# Altium PCB PCB1.PcbDoc
Units mil, origin at the board's own origin, x right, y up, seen from the top; angles counter-clockwise.
Board outline 3910 x 3910 mil, 2 copper layers (Top Layer, Bottom Layer); 110 components, 88 nets, 366 pads, 45 vias.
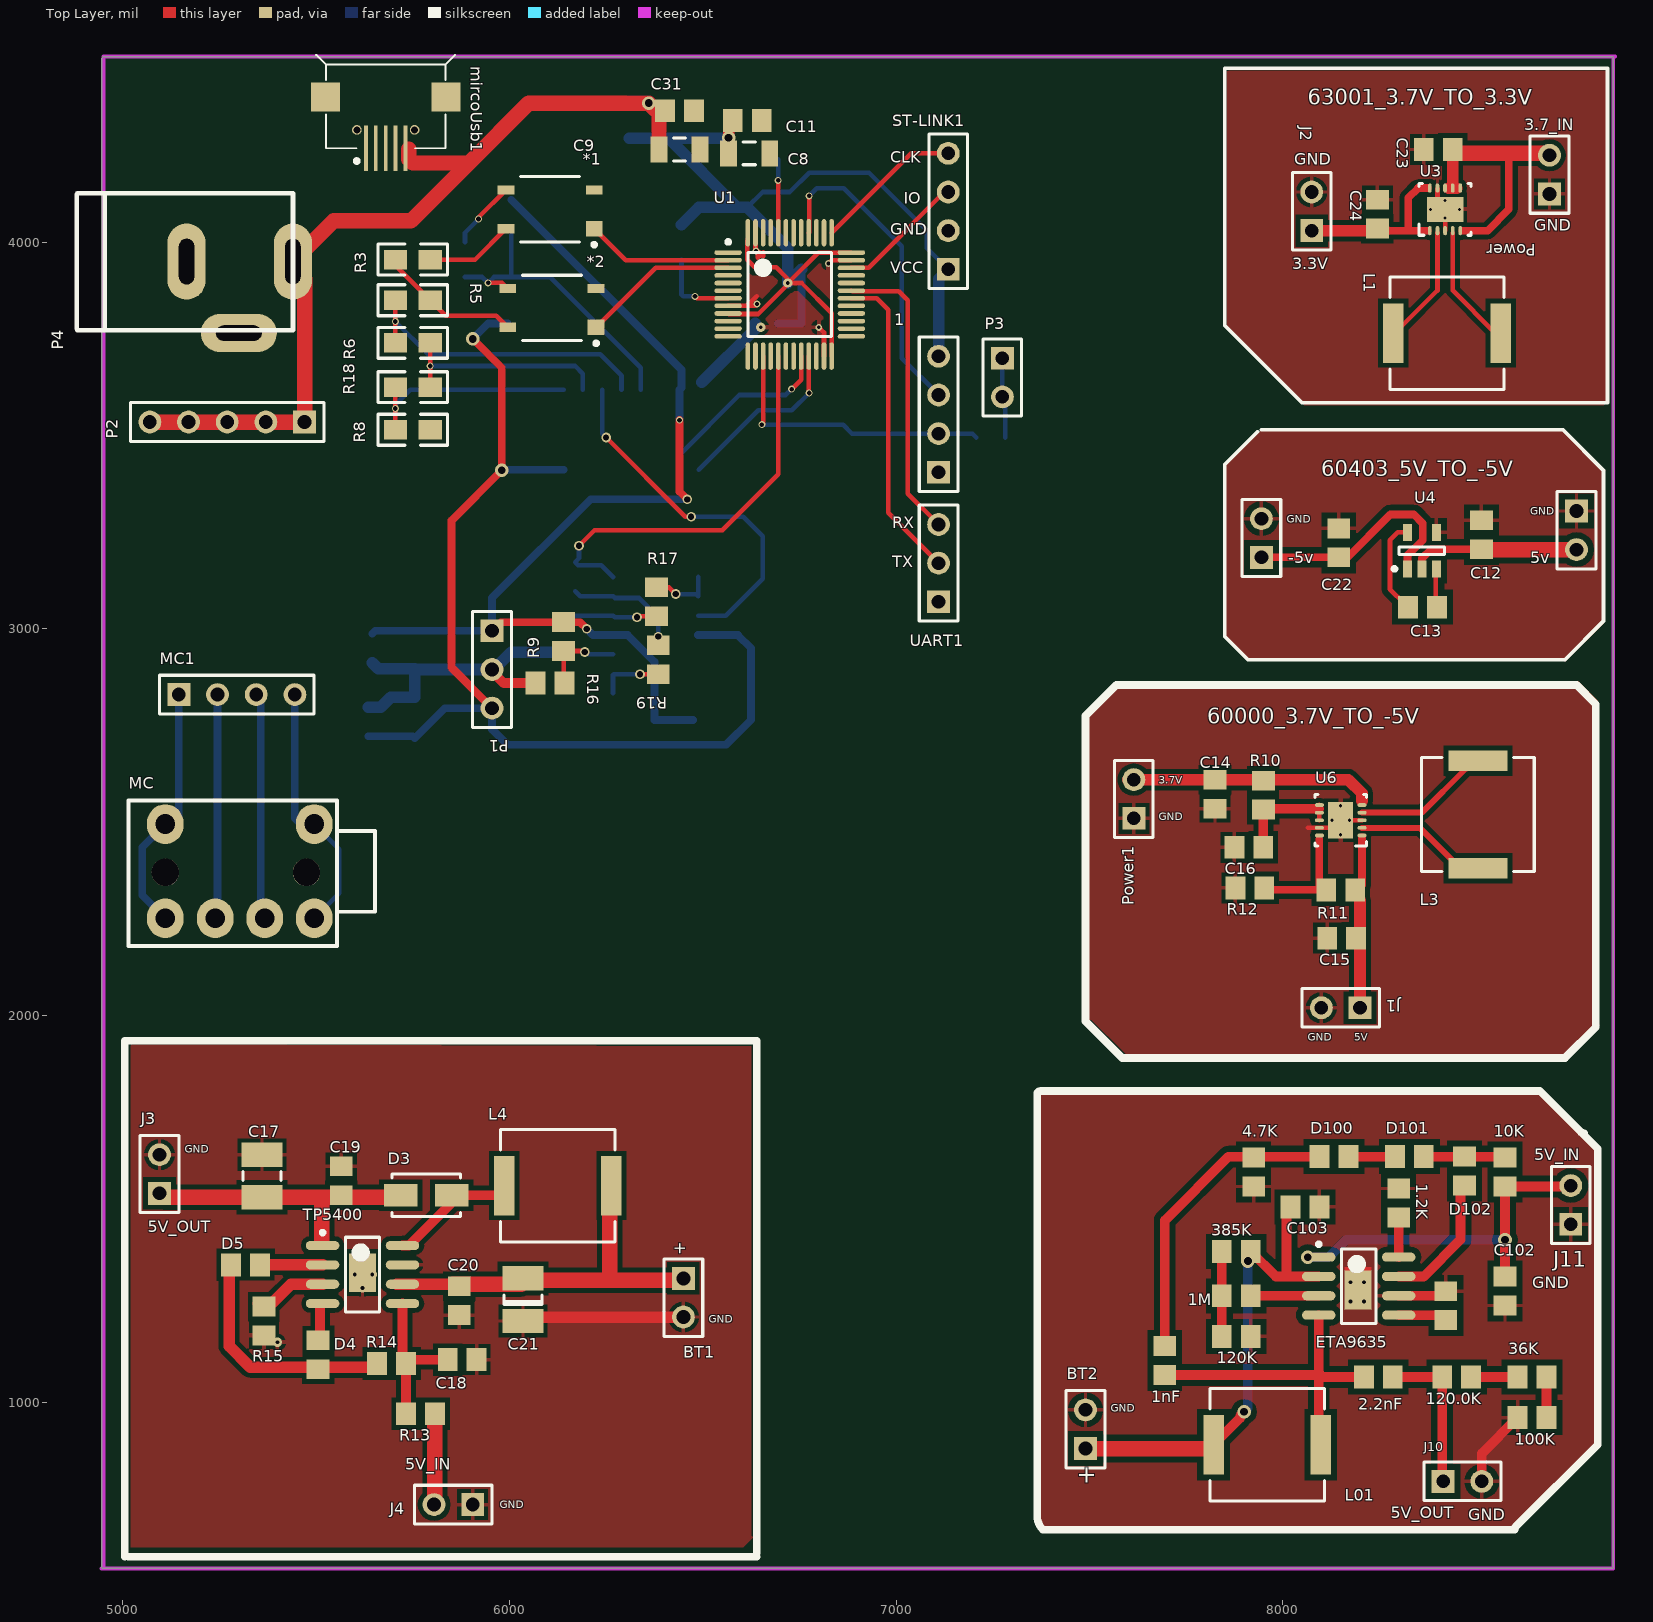
[diagram p0: Top Layer view]
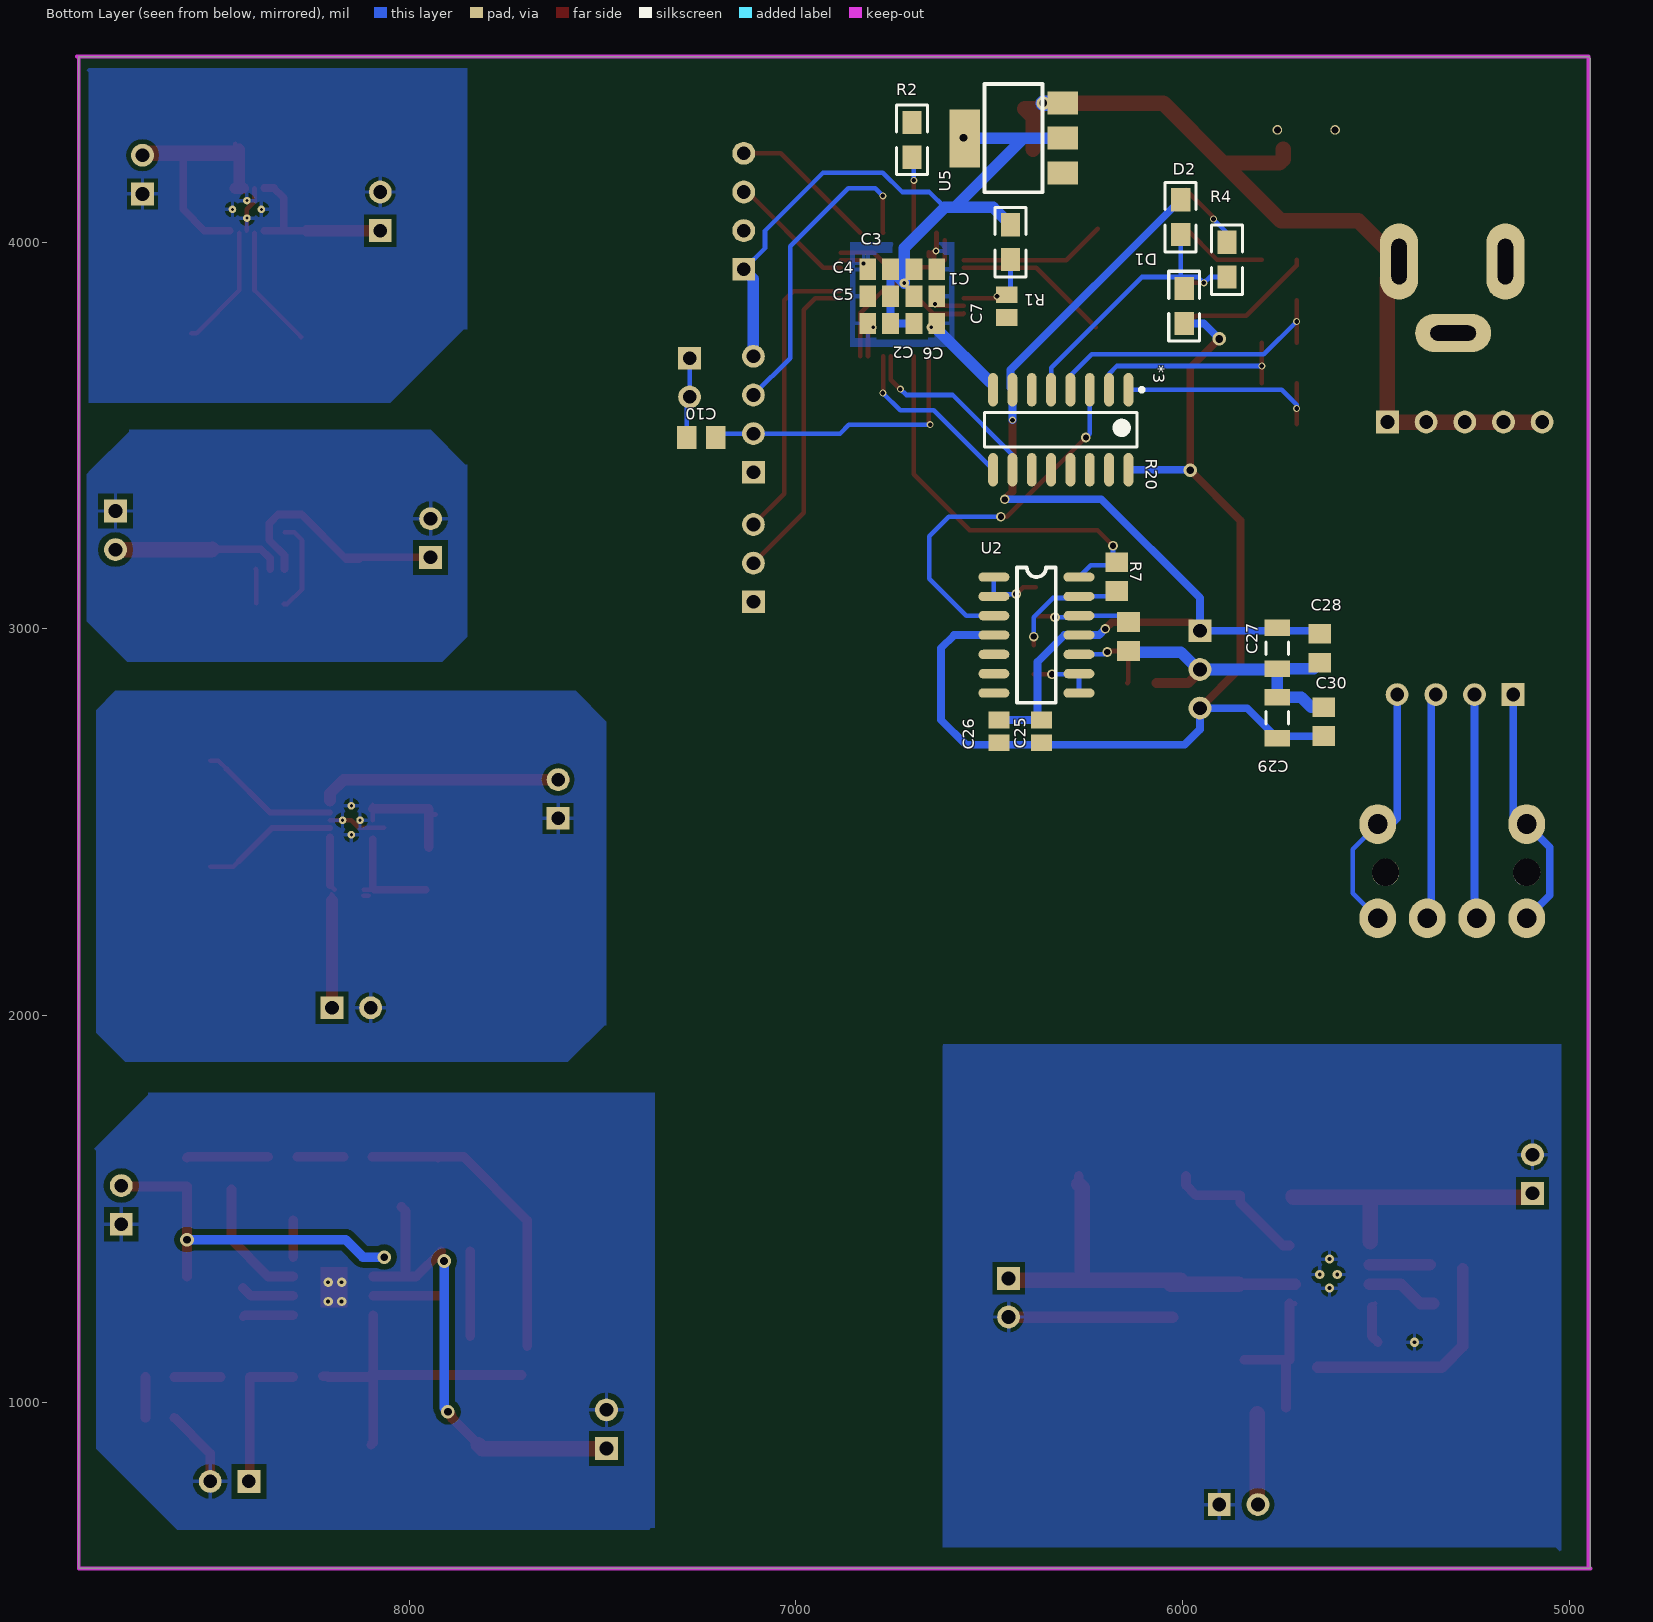
[diagram p1: Bottom Layer view, seen from below]

## Layer stack, top to bottom
Top Layer: signal copper 1.4
Dielectric: dielectric 12.6, FR-4, Dk 4.8
Bottom Layer: signal copper 1.4

## Board outline
4950,4480 8855,4480 8855,570 4945,570 4945,4475 4950,4480

## Design rules (kind name [scope] priority, off if disabled: settings)
Clearance [All] p1: gap=6
FabricationTestpoint [(IsPad And (OnTopLayer Or OnBottomLayer))] p1: side=3 testpointundercomponent=TRUE minsize=40 maxsize=100 preferedsize=60 minholesize=0 maxholesize=40 preferedholesize=32 testpointgrid=1 allowsidetop=TRUE allowsidebottom=TRUE usegrid=TRUE gridtolerance=0.01
HoleToHoleClearance [All] p1: gap=1 allowstackedmicrovias=TRUE
MinimumSolderMaskSliver [All] p1: minsoldermaskwidth=1
PolygonConnect [All] p1: connectstyle=Relief reliefconductorwidth=10 reliefentries=4 polygonreliefangle="90 Angle" airgapwidth=10
RoutingVias [All] p1: holewidth=14 width=28 viastyle="Through Hole" minholewidth=10 minwidth=10 maxholewidth=30 maxwidth=50
SilkToSilkClearance [All] p1: silktosilkclearance=1
SilkToSolderMaskClearance [IsPad] p1: minsilkscreentomaskgap=1 clearancetoexposedcopper=TRUE
SolderMaskExpansion [All] p1: expansion=4
Width [All] p1: maxlimit=50 minlimit=6 preferedwidth=12
23 further rules are at their usual default settings.

## Classes and differential pairs
component class NEW_POWER: 1.2K 1M 1nF 2.2nF 4.7K 10K 36K 100K 120.0K 120K 385K -2 BT1 BT2 C17 C18 C19 C20 C21 C102 C103 D3 D4 D5 D100 D101 D102 ETA1 ETA9635 J3 J4 J10 J11 L01 L4 R13 R14 R15 TP5400
component class SIGNAL: *1 *2 *3 C25 C26 C27 C28 C29 C30 D1 D2 MC MC1 P1 R3 R4 R5 R6 R7 R8 R9 R16 R17 R18 R19 R20 U2
component class mcu: 1 C1 C2 C3 C4 C5 C6 C7 C8 C9 C10 C11 mircoUsb1 P2 P3 P4 R1 R2 ST-LINK1 U1 U5 UART1
component class POWER: 5v -5v C12 C13 C14 C15 C16 C22 C23 C24 J1 J2 L1 L3 Power Power1 R10 R11 R12 U3 U4 U6

## Components (designator, comment, footprint, x,y, rotation, side; value= is the part's Value field where it differs from the comment)
1 "Header 4" HDR1X4 7110,3405 r90 top
1.2K "" 6-0805 8300,1515 r270 top
1M "" 6-0805 7880,1275 r180 top
1nF "" PCBComponent_1#1 7695,1070 r90 top
2.2nF "" PCBComponent_1#1 8210,1065 r0 top
4.7K "" 6-0805 7925,1595 r270 top
5v "Header 2" HDR1X2 8760,3305 r270 top
10K "" 6-0805 8575,1595 r90 top
36K "" 6-0805 8645,1065 r0 top
100K "" 6-0805 8645,960 r180 top
120.0K "" 6-0805 8450,1065 r0 top
120K "" 6-0805 7880,1170 r0 top
385K "" 6-0805 7880,1390 r180 top
*1 "AQY210_光耦" SOT254P605X218-4N 6105,4085 r180 top
*2 "AQY210_光耦" SOT254P605X218-4N 6110,3830 r180 top
*3 "74HC4052" SOP-16 6315,3515 r270 bottom
-5v "Header 2" HDR1X2 7945,3185 r90 top
BT1 "Battery" BAT-2 6450,1270 r270 top
BT2 "Battery" BAT-2 7490,930 r90 top
C1 "Cap" c0805 6665,3930 r0 bottom
C2 "Cap" c0805 6665,3860 r0 bottom
C3 "Cap" c0805 6785,3930 r180 bottom
C4 "Cap" c0805 6785,3860 r180 bottom
C5 "Cap" c0805 6785,3790 r180 bottom
C6 "Cap" c0805 6665,3790 r0 bottom
C7 "Cap" c0805 6455,3835 r90 bottom
C8 "Cap Pol2" C1206 6620,4230 r0 top
C9 "Cap Pol2" C1206 6440,4240 r0 top
C10 "Cap" 0805#1 7245,3495 r0 bottom
C11 "Cap" 0805#1 6615,4315 r180 top
C12 "" PCBComponent_1#1 8513.94,3206.02 r90 top
C13 "" PCBComponent_1#1 8323.94,3056.02 r0 top
C14 "" PCBComponent_1#1 7825,2535 r90 top
C15 "" PCBComponent_1#1 8115,2200 r0 top
C16 "" PCBComponent_1#1 7875,2435 r0 top
C17 "" 3225[1210] 5360,1585 r90 top
C18 "" PCBComponent_1#1 5915,1110 r180 top
C19 "" PCBComponent_1#1 5565,1610 r270 top
C20 "" PCBComponent_1#1 5870,1225 r90 top
C21 "" C1210 6035,1265 r90 top
C22 "" PCBComponent_1#1 8145,3185 r90 top
C23 "" PCBComponent_1#1 8365,4240 r0 top
C24 "" PCBComponent_1#1 8245,4110 r270 top
C25 "Cap" c0805 6365,2735 r90 bottom
C26 "Cap" c0805 6475,2735 r90 bottom
C27 "Cap Pol2" C1206 5755,2950 r270 bottom
C28 "Cap" 0805#1 5645,2950 r90 bottom
C29 "Cap Pol2" C1206 5755,2770 r270 bottom
C30 "Cap" 0805#1 5635,2760 r90 bottom
C31 "Cap" 0805#1 6440,4340 r180 top
C102 "" PCBComponent_1#1 8575,1250 r90 top
C103 "" PCBComponent_1#1 8095,1505 r180 top
D1 "Diode 1N4148" 0805#2 5995.83,3880 r270 bottom
D2 "Diode 1N4148" 0805#2 6005,4110 r270 bottom
D3 "SS24" CAPM4227X18N 5785,1535 r180 top
D4 "" PCBComponent_1#1 5505,1085 r90 top
D5 "" PCBComponent_1#1 5280,1355 r0 top
D100 "" PCBComponent_1#1 8170,1635 r180 top
D101 "" PCBComponent_1#1 8365,1635 r180 top
D102 "" PCBComponent_1#1 8470,1635 r270 top
ETA9635 "" SOP-8 8300,1225 r0 top
J1 "" HDR1X2 8200,2020 r180 top
J2 "" HDR1X2 8075,4030 r90 top
J3 "" HDR1X2 5095,1540 r90 top
J4 "" HDR1X2 5905,735 r180 top
J10 "" HDR1X2 8415,795 r0 top
J11 "" HDR1X2 8745,1460 r90 top
L1 "" INDP7474X40N 8425,3765 r180 top
L01 "" INDP7474X40N 7960,890 r0 top
L3 "" INDP7474X40N 8505,2520 r270 top
L4 "" INDP7474X40N 6125,1560 r180 top
MC "Header 4" PCBComponent_1#2 5380,2380 r270 top
MC1 "Header 4" HDR1X4 5145,2830 r0 top
mircoUsb1 "" Micro_USB 5680,4460 r90 top
P1 "Header 3" HDR1X3 5955,2995 r270 top
P2 "Header 5" HDR1X5 5470,3535 r180 top
P3 "Header 2" HDR1X2 7275,3700 r270 top
P4 "POWER" POWER_PLUG 5440,3950 r180 top
Power "Header 2" HDR1X2 8690,4125 r90 top
Power1 "Header 2" HDR1X2 7615,2510 r90 top
R1 "Res2" 0805#2 6445,4045 r270 bottom
R2 "Res2" 0805#2 6700,4310 r270 bottom
R3 "Res3" 0805#2 5705,3955 r0 top
R4 "Res3" 0805#2 5885,3910 r90 bottom
R5 "Res3" 0805#2 5705,3850 r0 top
R6 "Res3" 0805#2 5795,3740 r180 top
R7 "Res3" 0805#1 6140,2980 r90 bottom
R8 "Res3" 0805#2 5795,3515 r180 top
R9 "Res3" 0805#1 6140,2980 r90 top
R10 "" 2012[0805] 7950,2570 r90 top
R11 "" 2012[0805] 8150,2325 r0 top
R12 "" 2012[0805] 7915,2330 r0 top
R13 "0.3" 6-0805 5770,970 r180 top
R14 "1k" 6-0805 5695,1100 r180 top
R15 "1.2k" 6-0805 5365,1210 r270 top
R16 "Res3" 0805#1 6105,2860 r0 top
R17 "Res3" 0805#1 6380,3070 r90 top
R18 "Res3" 0805#2 5705,3625 r0 top
R19 "Res3" 0805#1 6385,2920 r270 top
R20 "Res3" 0805#1 6170,3135 r270 bottom
ST-LINK1 "Header 4" HDR1X4 7135,3930 r90 top
TP5400 "" SOP127P600X175-8N 5620,1330 r0 top
U1 "STM32L151C8T6" LQFP48_N 6725,3865 r0 top
U2 "OPA4277" SO-14 6630,3210 r180 bottom
U3 "TPS63001" QFN50P300X300X95-10M 8440,4325 r90 top
U4 "TPS60403" SOT95P280X110-5N 8360,3202.24 r90 top
U5 "LM1117-3.3" SOT223 6310,4178.9 r90 bottom
U6 "TPS63000" QFN50P300X300X95-10M 7910,2525 r180 top
UART1 "Header 3" HDR1X3 7110,3070 r90 top
? "" PCBComponent_1#1 8421.93,1286.93 r270 top

## Footprints (in the part's own frame and the unit in brackets; to place one, negate y for a bottom-side part, rotate by r counter-clockwise, add the part's x,y. Pads: shape width x height; smd on the part's side, far side on the other; paste and mask are expansions set on the pad)
6-0805 [mm] "Chip Resistor; Body 2.0 x 1.3 mm (LxW typ)"
  rect 1.3x1.5 smd: 1(-0.95,0) 2(0.95,0)
0805#1 [mm] "Chip Resistor; Body 2.0 x 1.3 mm (LxW typ)"
  rect 1.3x1.5 smd: 1(-0.95,0) 2(0.95,0)
0805#2 [mm]
  rect 1.524x1.27 smd: 1(0,0) 2(2.286,0)
  silkscreen extent -1.14,-1.02 3.43,1.02
2012[0805] [mm] "Chip Resistor; Body 2.0 x 1.3 mm (LxW typ)"
  rect 1.3x1.5 smd: 1(-0.95,0) 2(0.95,0)
3225[1210] [mm] "Chip Resistor; Body 3.2 x 2.5 mm (LxW typ)"
  rect 1.6x2.7 smd: 1(-1.4,0) 2(1.4,0)
  silkscreen extent -0.3,-1.25 0.3,1.25
BAT-2 [mm] "Multicell Battery; 2 Leads"
  rect 1.5x1.5 hole 0.9: 1(-1.27,0)
  round 1.5 hole 0.9: 2(1.27,0)
  silkscreen extent -2.54,-1.27 2.54,1.27
c0805 [mm] "Chip Capacitor, Body 2.0x1.3mm, IPC High Density"
  rect 1.1x1.4 smd: 1(-0.75,0) 2(0.75,0)
  body extent -1.1,-0.72 1.1,0.72, height 1.4
C1206 [mm] "Chip Capacitor, Body 3.2x1.6mm, IPC High Density"
  rect 1.1x1.7 smd: 1(-1.35,0) 2(1.35,0)
  silkscreen extent -0.4,-0.75 0.4,0.75, body extent -1.7,-0.9 1.7,0.9, height 1.3
C1210 [mm] "Chip Capacitor; Body 3.2 x 2.5 mm (LxW typ)"
  rect 1.6x2.7 smd: 1(-1.4,0) 2(1.4,0)
  silkscreen extent -0.3,-1.25 0.3,1.25
CAPM4227X18N [mm] "Molded Capacitor, 2-Leads, Body 4.2x2.7mm, IPC Medium Density"
  rect 2.2x1.45 smd: 1(-1.675,0) 2(1.675,0)
  silkscreen extent -2.25,-1.4 2.25,1.4, body extent -2.25,-1.4 2.25,1.4, height 1.8
HDR1X2 [mm] "Connector; Header; 2 Position"
  rect 1.5x1.5 hole 0.9: 1(0,0)
  round 1.5 hole 0.9: 2(2.54,0)
  silkscreen extent -1.27,-1.27 3.81,1.27
HDR1X3 [mm] "Connector; Header; 3 Position"
  rect 1.5x1.5 hole 0.9: 1(0,0)
  round 1.5 hole 0.9: 2(2.54,0) 3(5.08,0)
  silkscreen extent -1.27,-1.27 6.35,1.27
HDR1X4 [mm] "Connector; Header; 4 Position"
  rect 1.5x1.5 hole 0.9: 1(0,0)
  round 1.5 hole 0.9: 2(2.54,0) 3(5.08,0) 4(7.62,0)
  silkscreen extent -1.27,-1.27 8.89,1.27
HDR1X5 [mm] "Connector; Header; 5 Position"
  rect 1.5x1.5 hole 0.9: 1(0,0)
  round 1.5 hole 0.9: 2(2.54,0) 3(5.08,0) 4(7.62,0) 5(10.16,0)
  silkscreen extent -1.27,-1.27 11.43,1.27
INDP7474X40N [mm] "Precision Wire Wound Inductor, 2-Leads, Body 7.4x7.4mm, IPC Medium Density"
  rect 1.35x3.9 smd: 1(-3.525,0) 2(3.525,0)
  silkscreen extent -3.75,-3.7 3.75,3.7, body extent -3.7,-3.7 3.7,3.7, height 4
LQFP48_N [mm]
  oval 1.8x0.3 smd: 1(-4.05,2.75) 2(-4.05,2.25) 3(-4.05,1.75) 4(-4.05,1.25) 5(-4.05,0.75) 6(-4.05,0.25) 7(-4.05,-0.25) 8(-4.05,-0.75) 9(-4.05,-1.25) 10(-4.05,-1.75) 11(-4.05,-2.25) 12(-4.05,-2.75) 25(4.05,-2.75) 26(4.05,-2.25) 27(4.05,-1.75) 28(4.05,-1.25) 29(4.05,-0.75) 30(4.05,-0.25) 31(4.05,0.25) 32(4.05,0.75) 33(4.05,1.25) 34(4.05,1.75) 35(4.05,2.25) 36(4.05,2.75)
  oval 0.3x1.8 smd: 13(-2.75,-4.05) 14(-2.25,-4.05) 15(-1.75,-4.05) 16(-1.25,-4.05) 17(-0.75,-4.05) 18(-0.25,-4.05) 19(0.25,-4.05) 20(0.75,-4.05) 21(1.25,-4.05) 22(1.75,-4.05) 23(2.25,-4.05) 24(2.75,-4.05) 37(2.75,4.05) 38(2.25,4.05) 39(1.75,4.05) 40(1.25,4.05) 41(0.75,4.05) 42(0.25,4.05) 43(-0.25,4.05) 44(-0.75,4.05) 45(-1.25,4.05) 46(-1.75,4.05) 47(-2.25,4.05) 48(-2.75,4.05)
  silkscreen extent -4.17,-2.75 2.75,3.57
Micro_USB [mm]
  rect 3x0.25 smd: 1(-5.508,1.3) 2(-5.508,0.65) 3(-5.508,0) 4(-5.508,-0.65) 5(-5.508,-1.3)
  round 0.635 hole 0.457 unplated: MH1(-4.3,1.9) MH2(-4.3,-1.9)
  rect 1.9x1.9 smd: ""(-2.15,3.95) ""(-2.15,-3.95)
  silkscreen extent -6.47,-4.57 0.63,4.57
PCBComponent_1#1 [mm]
  rect 1.3x1.5 smd: 1(0,0) 2(1.9,0)
PCBComponent_1#2 [mm]
  oval 2.6x2.4 hole 1.3: 1(-2.921,2.921) 1(3.268,2.921) 2(3.268,-0.329) 3(3.268,-3.579) 4(-2.921,-6.858) 4(3.268,-6.858)
  round 1.8 hole 1.8: ""(0.254,2.413) ""(0.254,-6.858)
  silkscreen extent -4.47,-9.27 5.08,6.92
POWER_PLUG [mm]
  oval 2.5x5 hole 1 slot 3 at 90 deg: 1(0,0) 3(6.985,0)
  oval 5x2.5 hole 1 slot 3 at 0 deg: 2(3.556,4.699)
  silkscreen extent 0,-4.5 14.2,4.5
QFN50P300X300X95-10M [mm] "QFN, 10-Leads, Body 3.1x3.1mm (max), Pitch 0.50mm, IPC Low Density"
  oval 0.6x0.24 smd paste-0.102 mask+0.051: 1(-7.496,1.508) 2(-7.496,1.008) 3(-7.496,0.508) 4(-7.496,0.008) 5(-7.496,-0.492) 6(-4.696,-0.492) 7(-4.696,0.008) 8(-4.696,0.508) 9(-4.696,1.008) 10(-4.696,1.508)
  rect 1.65x2.4 smd paste-1.187 mask+0.051: 11(-6.096,0.508)
  round 0.5 / inner round 1.524 / far side round 0.5 hole 0.203 mask+0.051: V(-6.671,0.508) V_2(-6.096,1.458) V_3(-6.096,-0.442) V_4(-5.521,0.508)
  silkscreen extent -7.8,-1.19 -4.4,2.21
SO-14 [mil]
  oval 80x24 smd: 1(142,-76) 2(142,-126) 3(142,-176) 4(142,-226) 5(142,-276) 6(142,-326) 7(142,-376) 8(362,-376) 9(362,-326) 10(362,-276) 11(362,-226) 12(362,-176) 13(362,-126) 14(362,-76)
  silkscreen extent 202,-401 302,-51
SOP127P600X175-8N [mm] "SOP, 8-Leads, Body 4.9x3.9mm (max), Pitch 1.27mm, IPC Medium Density"
  oval 2.2x0.6 smd: 1(-2.625,1.905) 2(-2.625,0.635) 3(-2.625,-0.635) 4(-2.625,-1.905) 5(2.625,-1.905) 6(2.625,-0.635) 7(2.625,0.635) 8(2.625,1.905)
  silkscreen extent -2.75,-2.45 1.12,2.88, body extent -1.95,-2.45 1.95,2.45, height 1.75
SOP-8 [mm] "SOP, 8-Leads, Body 4.9x3.9mm (max), Pitch 1.27mm, IPC Medium Density"
  oval 2.2x0.6 smd: 1(-5.25,3.81) 2(-5.25,2.54) 3(-5.25,1.27) 4(-5.25,0) 5(0,0) 6(0,1.27) 7(0,2.54) 8(0,3.81)
  silkscreen extent -5.37,-0.55 -1.5,4.78, body extent -4.58,-0.55 -0.68,4.36, height 1.75
SOP-16 [mm] "SOP, 16-Leads, Body 10.0x8.9mm (max), Pitch 1.27mm, IPC Medium Density"
  oval 2.2x0.65 smd: 1(-2.625,4.445) 2(-2.625,3.175) 3(-2.625,1.905) 4(-2.625,0.635) 5(-2.625,-0.635) 6(-2.625,-1.905) 7(-2.625,-3.175) 8(-2.625,-4.445) 9(2.625,-4.445) 10(2.625,-3.175) 11(2.625,-1.905) 12(2.625,-0.635) 13(2.625,0.635) 14(2.625,1.905) 15(2.625,3.175) 16(2.625,4.445)
  silkscreen extent -2.75,-5 1.12,5.44, body extent -1.13,-5 1.12,5, height 1.75
SOT95P280X110-5N [mm] "SOT23, 5-Leads, Body 3.0x3.0mm (max), Pitch 0.95mm, IPC Medium Density"
  rect 1.1x0.6 smd: 1(-1.2,0.95) 2(-1.2,0) 3(-1.2,-0.95) 4(1.2,-0.95) 5(1.2,0.95)
  silkscreen extent -1.32,-1.5 0.25,1.92, body extent -0.85,-1.5 0.85,1.5, height 1.1
SOT223 [mil]
  rect 59x79 smd: 1(0,0) 2(90.55,0) 3(181.1,0)
  rect 150x79 smd: 4(89.88,253.54)
  silkscreen extent -49,52 231,202
SOT254P605X218-4N [mm] "SOT143, 4-Leads, Body 4.3x6.1mm (max), Pitch 2.54mm, IPC Medium Density"
  rect 1.1x1 smd: 1(-2.9,1.27)
  rect 1.1x0.6 smd: 2(-2.9,-1.27) 3(2.9,-1.27) 4(2.9,1.27)
  silkscreen extent -3.03,-2.15 1.95,2.44, body extent -1.94,-2.14 1.94,2.14, height 2.18

## Part data
1 MC MC1 ST-LINK1: "Header, 4-Pin"
1.2K 1M 4.7K 10K 36K 100K 120.0K 120K 385K: library part "Res Thermal", "Thermistor"
1nF 2.2nF C12 C13 C14 C15 C16 C18 C19 C20 C21 C22 C23 C24 C102 C103 ?: library part "Cap Semi", "Capacitor (Semiconductor SIM Model)"
5v -5v P3 Power Power1: "Header, 2-Pin"
*1 *2: "AQY210"
BT1 BT2: "Multicell Battery"
C1 C2 C3 C4 C5 C6 C7 C10 C11 C25 C26 C28 C30 C31: "Capacitor"
C8 C9 C27 C29: "Polarized Capacitor (Axial)"
C17: library part "Cap Pol3", "Polarized Capacitor (Surface Mount)"
D1 D2: library part "Diode 1N4002", "1 Amp General Purpose Rectifier"
D3: library part "Diode 11DQ03", "Schottky Rectifier"
D4 D5 D100 D101 D102: library part "Diode 1N4005", "1 Amp General Purpose Rectifier"
ETA9635 TP5400 U3 U4 U6: library part Component_1
J1 J2 J3 J4 J10 J11: library part "Header 2", "Header, 2-Pin"
L1 L01 L3 L4: library part Inductor, "Inductor"
mircoUsb1: library part "Header 5", "Header, 5-Pin"
P1 UART1: "Header, 3-Pin"
P2: "Header, 5-Pin"
R1 R2 R3 R4 R5 R6 R7 R8 R9 R16 R17 R18 R19 R20: "Resistor"
R10 R11 R12: library part "Res Semi", "Semiconductor Resistor"
R13 R14 R15: library part "Res Thermal"
U1: "STM32 ARM-based 32-bit MCU with 64 Kbytes Flash, 48-pin LQFP, Industrial Temperature"
U2: "High Precision Operational Amplifiers"

## Free pads (board coordinates)
  rect 70x100 smd: 0(5620,1335) 0(8195,1290)

## Via types
v1: diameter 18, hole 12, Top Layer to Bottom Layer, 12 vias
v2: diameter 24, hole 10, Top Layer to Bottom Layer, 11 vias
v3: diameter 25, hole 16, Top Layer to Bottom Layer, 10 vias
v4: diameter 35, hole 20, Top Layer to Bottom Layer, 8 vias
v5: diameter 18, hole 10, Top Layer to Bottom Layer, 4 vias

## Nets (pads, with @x,y where several pads share a name; then routed paths per layer and width w, separated by ;. In a path a pad name is that pad's centre, name@x,y a point inside that pad or via, vN(x,y) a via of type N, cw(c..) or ccw(c..) an arc to the next point about the centre after c; other vN are vias at no path point)
1.5_OR_16.6V: *2.3 *3.5 D1.1 D2.2 R4.1 | length 788.5
  Top Layer w12: v1(5945,3895) 5980.83,3895 *2.3
  Bottom Layer w12: R4.1 5930,3910 v1(5945,3895) 5960,3910 6005,3910 ; D2.2 6005,3910 ; *3.5 6340,3675 6105,3910 6005,3910
1.5V_4: *1.3 R4.2 | length 178.8
  Top Layer w12: v1(5920,4060) 5920,4064.17 *1.3
  Bottom Layer w12: R4.2 5885,4025 v1(5920,4060)
1.5V_4_SET: *1.1 U1.2 | length 380.1
  Top Layer w12: *1.1 6300.59,3953.58 U1.2
3.7V_1: C14.2 Power1.2 R10.2 U6.5 | length 639.5
  Top Layer w30: Power1.2@7600,2610 8170,2610 8205.12,2574.88 8205.12,2555
3.7V_2: C23.2 Power.2 U3.5 U3.6 U3.7 U3.8 | length 671.9
  Top Layer w12: C23.2@8450,4255 8450,4235 C23.2@8455,4230
  Top Layer w20: 8465,4029.88 8529.88,4029.88 8585,4085 8585,4230
  Top Layer w30: 8430,4140.12 U3.7 ; C23.2 8439.8,4140.24 U3.7 ; 8450,4140.12 U3.7
  Top Layer w40: C23.2@8455,4230 8585,4230 8685,4230 Power.2
5V: J4.2 R13.1 | length 236
  Top Layer w40: J4.2 5807.4,737.4 R13.1
5V_1: C15.2 J1.1 R11.2 U6.1 | length 441.7
  Top Layer w12: R11.2@8192.4,2325 R11.2@8205.12,2337.72 ; R11.2@8200,2297.4 8200,2312.6 R11.2@8201.02,2313.62
  Top Layer w20: R11.2@8205.12,2337.72 8205.12,2460.32
  Top Layer w30: J1.1@8195,2015 J1.1 R11.2@8200,2297.4
5V_3: 5v.2 C12.1 U4.2 | length 437.4
  Top Layer w20: U4.2 8360,3182.09 8383.94,3206.02 C12.1@8510,3206.02
  Top Layer w40: C12.1@8510,3206.02 8511.02,3205 5v.2
5V_4: *3.16 C25.1 C26.1 C29.2 C30.1 D1.2 P1.3 U2.4 | length 2810.8
  Top Layer w20: v4(5905,3750) 5980,3675 v4(5980,3410) 5850,3280 5850,2900 P1.3
  Bottom Layer w20: C30.1 5749.25,2722.6 C29.2 5833.15,2795 P1.3 5955,2740 5995,2700 6560,2700 6625,2765 6625,2950 6591,2984 U2.4 ; v4(5905,3750) 5945,3790 D1.2 ; v4(5980,3410) 5981.65,3411.65 *3.16
5V_IN: C9.1 C31.2 mircoUsb1.5 P2.1 P2.2 P2.3 P2.4 P2.5 P4.1 U5.3 | length 2318.8
  Top Layer w40: P2.5 P2.4 P2.3 P2.2 P2.1 5470,3905 5440,3935 P4.1 5545,4055 5745,4055 5895,4205 ; 5740,4240 5740,4215 5750,4205 5895,4205 ; C9.1 6386.85,4324.25 6407.6,4345 6375,4345 v4(6360,4360) 6050,4360 5895,4205
  Bottom Layer w40: U5.3 v4(6360,4360)
16.6V: *2.4 R3.1 R5.2 | length 372.1
  Top Layer w12: R3.1 5705,3940 R5.2 5835,3810 5965.83,3810 *2.4
16.6V_SET: *2.1 U1.3 | length 405.1
  Top Layer w12: *2.1 6378.07,3933.9 U1.3
187.5V_4: *3.4 R5.1 R6.2 | length 789.6
  Top Layer w12: R6.2 v1(5705,3795) R5.1
  Bottom Layer w12: v1(5705,3795) 5790,3710 6235,3710 6290,3655 *3.4
625V_4: *3.2 R6.1 R18.2 | length 549.9
  Top Layer w12: R18.2@5795,3635 v1(5795,3680) R6.1
  Bottom Layer w12: v1(5795,3680) 6170,3680 6190,3660 *3.2
1250V: *3.1 R8.2 R18.1 | length 565.9
  Top Layer w12: R8.2@5705,3530 5705,3580 R18.1@5705,3635
  Bottom Layer w12: v1(5705,3570) 5705,3580 5743.35,3618.35 *3.1
4052_A: *3.10 U1.20 | length 494.5
  Top Layer w12: v1(6730,3620) 6754.53,3644.53 U1.20
  Bottom Layer w12: *3.10 6440,3450 6595,3605 6715,3605 v1(6730,3620)
4052_B: *3.9 U1.21 | length 463
  Top Layer w12: U1.21 6774.21,3610.79 v1(6775,3610)
  Bottom Layer w12: *3.9 6643.35,3565 6730,3565 v1(6775,3610)
-2.5V_4: R9.1 R16.2 U2.10 | length 220
  Top Layer w12: R16.2 6140,2862.4 R9.1 6197.4,2942.6 v3(6195,2940.2)
  Bottom Layer w12: v3(6195,2940.2) 6201.2,2934 U2.10
-5V_1: -5v.1 C22.1 U4.1 | length 647.2
  Top Layer w20: -5v.1 C22.1@8167.94,3185 ; C22.1@8130,3180 8162.91,3180 8278.94,3296.02 8338.94,3296.02 8362.4,3272.56 8362.4,3229.49 8322.6,3189.69 U4.1
-5V_4: *3.7 C25.2 C26.2 C27.1 C28.2 D2.1 P1.1 R9.2 U2.11 | length 2698.5
  Top Layer w20: P1.1 5977.4,3017.4 R9.2 6182.6,3017.4 v3(6200,3000) ; v1(6440,3540) 6440,3355 v3(6460,3335)
  Bottom Layer w20: C28.2 5652.6,2995 P1.1 5955,3080 6210,3335 v3(6460,3335) ; D2.1 6445,3670 6445,3623.35 *3.7 v1(6440,3540) ; v3(6200,3000) 6216,2984 U2.11 6306,2984 6375,2915 6375,2764.53 C26.2
ADC_6: U1.16
ADC_7: R20.1 U1.17 U2.14 | length 1058.6
  Top Layer w12: v3(6180,3215) 6220,3255 6550.94,3255 6695.47,3399.53 U1.17
  Bottom Layer w12: v3(6180,3215) 6180,3182.4 R20.1 6177.4,3165 6237,3165 U2.14
ADC_8: U1.18
ADC_9: U1.19
ADC_20: U1.27
ADC_21: U1.28
COMP2_INM: U1.39
COMP2_INP: 1.3 U1.40 | length 830.6
  Top Layer w12: U1.40 6775,4025.24 v1(6775,4120)
  Bottom Layer w12: v1(6775,4120) 6795,4140 6865,4140 7015,3990 7015,3700 1.3
DAC_1: U1.14
DAC_2: 1.2 C10.1 U1.15 | length 747
  Top Layer w12: v1(6653.05,3528.05) 6656.1,3531.1 U1.15
  Bottom Layer w12: v1(6653.05,3528.05) 6863.05,3528.05 6886.1,3505 1.2 7197.6,3505 C10.1
GND: 1.1 *1.2 *2.2 *3.8 C1.1 C2.1 C3.1 C4.1 C5.1 C6.1 C7.1 C8.2 C9.2 C11.1 C27.2 C28.1 C29.1 C30.2 C31.1 mircoUsb1.1 P1.2 P4.2 P4.3 R2.1 R7.1 R8.1 R16.1 ST-LINK1.2 U1.8 U1.23 U1.35 U1.47 U5.1 UART1.1 | length 1426.4
  Top Layer w12: U1.8 6615.47,3835.47 ; U1.47 6636.42,3983.58 6651.22,3968.78 ; v5(6639.99,3840.47) 6634.99,3835.47 6615.47,3835.47 ; 6640,3860 6615.47,3835.47 ; v5@6642.68,3977.02 6642.68,3960.24 6656.68,3974.25 6656.68,3963.62 ; v5(6800,3780) 6813.58,3766.42 U1.23 ; v5(6825,3945) 6833.58,3953.58 U1.35
  Top Layer w25: P1.2@5955,2890 5985,2860 R16.1
  Bottom Layer w30: C30.2 5667.4,2797.4 5693.15,2823.15 C29.1 C27.2 ; C28.1 5660.75,2896.85 C27.2 ; P1.2@5955,2890 6005,2940 6137.4,2940 R7.1 ; P1.2 5756.85,2895 C27.2 ; *3.8@6497.5,3637.5 6635.47,3775.47 C6.1
  other v2: 6650,3780
  other v5: 6637.68,3977.33
GND_60403: 5v.1 -5v.2 C12.2 C22.2 U4.4
GND_63000: C14.1 C15.1 C16.1 J1.2 Power1.1 R12.1 U6.3 U6.9 U6.11 U6.V U6.V_2 U6.V_3 U6.V_4 | length 148
  Top Layer w12: 8065.31,2485.31 U6.9 8130.31,2485.31 U6.11 U6.V U6.3
GND_63001: C23.1 C24.1 J2.2 Power.1 U3.3 U3.9 U3.11 U3.V U3.V_2 U3.V_3 U3.V_4 | length 118.4
  Top Layer w12: U3.9 8400.31,4104.69 U3.11 U3.V U3.3
GND_ETA9635: 1.2K.1 4.7K.2 100K.2 120K.2 ?.1 BT2.2 C102.1 C103.1 ETA9635.6 J10.2 J11.1 pad.0@8195,1290 | length 341.6
  Top Layer w25: ETA9635.6 8410,1275 ?.1@8430,1295 ; J10.2 8515,867.4 100K.2
  other v2: 8175,1260 8210,1260 8175,1310 8210,1310
GND_TP5400: BT1.2 C17.2 C18.1 C19.1 C20.1 C21.1 J3.2 J4.1 pad.0@5620,1335 R15.2 TP5400.7 | length 430
  Top Layer w30: C21.1@6025,1220 BT1.2@6455,1220
  other v2: 5400,1155 5620,1295 5600,1330 5645,1330 5620,1370
IOUT: C17.1 C19.2 D3.2 J3.1 TP5400.1 | length 750.1
  Top Layer w12: C17.1@5385.12,1530 C17.1@5388.58,1526.54
  Top Layer w30: D3.2@5713.94,1529.88 D3.2
  Top Layer w40: J3.1 5105.12,1529.88 C17.1 5515,1529.88 ; TP5400.1@5515,1415 5515,1529.88 ; D3.2@5713.94,1529.88 5515,1529.88
Net1.2K_2: 1.2K.2 ETA9635.8 | length 95
  Top Layer w25: ETA9635.8 1.2K.2@8300,1470
Net1M_1: 1M.1 ETA9635.3 | length 175.9
  Top Layer w25: 1M.1 ETA9635.3
Net1M_2: 1M.2 120K.1 385K.2 | length 220
  Top Layer w25: 120K.1 1M.2 385K.2
Net1nF_1: 1nF.1 2.2nF.1 ETA9635.4 L01.2 | length 979.6
  Top Layer w25: 1nF.1@7710,1070 8088.31,1070 8093.31,1075 ; 8093.31,1196.69 8093.31,1075 ; ETA9635.4 8093.31,1075 ; L01.2 8093.31,895.47 8093.31,1075 ; 2.2nF.1@8223.31,1066.69 8210.7,1066.69 2.2nF.1 8103.31,1065 8093.31,1075
Net1nF_2: 1nF.2 4.7K.1 D100.2 | length 797.4
  Top Layer w25: 1nF.2 7695,1470 7860,1635 4.7K.1@7927.6,1635 ; 4.7K.1 4.7K.1@7927.6,1635 ; D100.2 4.7K.1@7927.6,1635
Net2.2nF_2: 2.2nF.2 120.0K.1 J10.1 | length 383.8
  Top Layer w25: 2.2nF.2@8299.8,1065 120.0K.1 8412.6,797.4 J10.1
Net10K_1: 10K.1 C102.2 ETA9635.1 J11.2 | length 932.4
  Top Layer w25: C102.2 v4(8575,1420) 10K.1 8742.6,1557.6 J11.2
  Bottom Layer w25: v4(8065,1375) 8120,1375 8165,1420 v4(8575,1420)
Net10K_2: 10K.2 D101.1 D102.1 | length 221.1
  Top Layer w25: D101.1@8375,1635 D101.1 D102.1 8572.4,1635 10K.2
Net36K_1: 36K.1 120.0K.2 | length 120.2
  Top Layer w25: 120.0K.2 36K.1
Net36K_2: 36K.2 100K.1 | length 105
  Top Layer w25: 100K.1 36K.2
Net385K_1: 385K.1 BT2.1 C103.2 ETA9635.2 L01.1 | length 1244.7
  Top Layer w25: L01.1 7890,958.78 7890,965 v4(7900,975) ; v4(7910,1365) 385K.1@7917.4,1372.4 ; 385K.1 7982.4,1325 8010,1325 ; C103.2 8010,1494.8 8010,1325 ; ETA9635.2 8010,1325
  Top Layer w40: BT2.1 7811.22,880 L01.1
  Bottom Layer w25: v4(7900,975) 7910,985 v4(7910,1365)
Net_2: ?.2 ETA9635.5 | length 132
  Top Layer w20: ?.2@8425.2,1225 ?.2@8430,1220.2
  Top Layer w25: ETA9635.5 ?.2@8425.2,1225
NetBT1_1: BT1.1 C20.2 C21.2 L4.1 TP5400.6 | length 1115.1
  Top Layer w25: L4.1@6268.78,1563.78 L4.1@6268.78,1585
  Top Layer w30: TP5400.6@5708.35,1305 C20.2@5855,1305
  Top Layer w40: C20.2@5855,1305 C21.2@6030,1305 ; C21.2@6005,1315.12 6260,1315.12 6260,1555 L4.1@6268.78,1563.78 ; 6185.12,1315.12 BT1.1@6450,1315.12
NetC10_2: C10.2 P3.1 P3.2 | length 208.1
  Bottom Layer w12: P3.1 P3.2 7282.4,3592.6 C10.2
NetC13_1: C13.1 U4.5 | length 242.7
  Top Layer w12: U4.5 8297.4,3249.49 8277.4,3229.49 8277.4,3102.56 8315.47,3064.49 C13.1@8323.94,3064.49
NetC13_2: C13.2 U4.3 | length 89.6
  Top Layer w12: C13.2@8395.87,3066.02 8395.87,3153.46 U4.3
NetC16_2: C16.2 R10.1 U6.6 U6.7 U6.8 | length 320.9
  Top Layer w12: R10.1@7932.4,2520 7950,2520 7952.4,2520 7950,2522.4 7949.8,2522.6 7949.8,2535 R10.1@7951.89,2537.09 ; U6.8 U6.7 8094.88,2535 U6.6
  Top Layer w25: R10.1@7949.8,2535 8094.88,2535 ; C16.2@7950,2435.2 7950,2520 7950,2522.4 R10.1
NetC18_2: C18.2 R13.2 R14.1 TP5400.5 | length 394
  Top Layer w12: TP5400.5@5710,1253.35 5708.35,1255 TP5400.5
  Top Layer w25: TP5400.5 5723.35,1110 C18.2 ; R13.2@5732.4,985.2 R14.1
NetD3_1: D3.1 L4.2 TP5400.8 | length 367.5
  Top Layer w25: TP5400.8 5740,1405 5850.94,1515.94 D3.1 5965,1535 5991.22,1561.22 L4.2@5991.22,1585
NetD4_1: D4.1 D5.1 R14.2 | length 597.8
  Top Layer w30: D5.1@5275,1345 5275,1145 5330,1090 R14.2@5650,1090
NetD4_2: D4.2 TP5400.4 | length 109.7
  Top Layer w12: TP5400.4@5501.65,1255 TP5400.4@5510,1246.65
  Top Layer w25: D4.2@5495,1155 5510,1170 TP5400.4@5510,1246.65
NetD5_2: D5.2 TP5400.2 | length 156.7
  Top Layer w30: D5.2@5360,1355 TP5400.2
NetD100_1: D100.1 D101.2 | length 120.2
  Top Layer w25: D100.1 D101.2
NetD102_2: D102.2 ETA9635.7 | length 329.4
  Top Layer w25: ETA9635.7 8365,1325 8460,1420 D102.2@8460,1550
NetL1_1: L1.1 U3.4 | length 318.4
  Top Layer w12: U3.4@8439.69,4023.98 8439.69,3875.31 8550,3765 L1.1
NetL1_2: L1.2 U3.2 | length 318.8
  Top Layer w12: L1.2@8280,3755 8400.32,3875.32 U3.2@8400.32,4023.98
NetL3_1: L3.1 U6.4 | length 365.4
  Top Layer w12: L3.1@8472.5,2637.5 8493.78,2658.78 L3.1 L3.1@8515,2658.78
  Top Layer w15: U6.4 8359.68,2524.68 L3.1@8472.5,2637.5
NetL3_2: L3.2 U6.2 | length 467.9
  Top Layer w12: 8360,2480 8442.37,2397.63 8455,2385 L3.2@8515,2385
  Top Layer w15: U6.2 8354.69,2485.31 L3.2@8442.37,2397.63
NetMC1_1: MC1.1 MC.4 | length 680.8
  Bottom Layer w20: MC.4@5100,2470 5115,2470 5145,2500 MC1.1 ; MC.4@5110,2251.34 5050,2311.34 5050,2435 MC.4@5110,2495
NetMC1_2: MC1.2 MC.3 | length 610.2
  Bottom Layer w20: MC.3@5229.1,2226.34 5245,2242.24 MC1.2
NetMC1_3: MC1.3 MC.2 | length 608.7
  Bottom Layer w20: MC1.3 5357.05,2817.95 MC.2@5357.05,2226.34
NetMC1_4: MC1.4 MC.1 | length 674.1
  Bottom Layer w12: MC.1@5495,2251.34 5560,2316.34 5560,2430 MC.1@5495,2495
  Bottom Layer w20: MC1.4 5445,2510 MC.1@5485,2470
NetR2_2: R2.2 U1.44 | length 190.7
  Top Layer w12: v1(6695,4160) 6695.47,4159.53 U1.44
  Bottom Layer w12: v1(6695,4160) R2.2@6695,4215
NetR7_2: R7.2 R17.1 U2.12 | length 249.6
  Top Layer w12: v3(6330,3030) 6332.6,3032.6 R17.1
  Bottom Layer w12: R7.2 6156.6,3034 U2.12 6272,3030 v3(6330,3030)
NetR11_1: R11.1 R12.2 U6.10 | length 306.2
  Top Layer w12: R11.1@8090,2325 R11.1@8117.6,2325 ; R11.1@8105,2310 R11.1@8118.98,2310
  Top Layer w20: R12.2@7957.4,2325 8090,2325 8094.88,2329.88 8094.88,2455
NetR15_1: R15.1 TP5400.3 | length 187.4
  Top Layer w30: R15.1@5350,1255 5385,1255 5435,1305 TP5400.3
NetR17_2: R17.2 U2.1 U2.2 | length 167.7
  Top Layer w12: R17.2 6412.6,3107.4 v3(6430,3090)
  Bottom Layer w12: v3(6430,3090) 6482,3090 U2.2 U2.1
NetR19_1: R19.1 R20.2 U2.13 | length 315.6
  Top Layer w12: R19.1 v3(6385,2980)
  Bottom Layer w12: R20.2 6183.6,3084 U2.13 6272,3080 6335,3080 6385,3030 v3(6385,2980)
NetR19_2: R19.2 U2.8 U2.9 | length 164.8
  Top Layer w12: v3(6337.6,2882.6) R19.2
  Bottom Layer w12: U2.8 6268,2881.2 6269.4,2882.6 v3(6337.6,2882.6)
NRST: C7.2 R1.2 U1.7 | length 214.9
  Top Layer w12: v1(6480,3860) 6484.84,3855.16 U1.7
  Bottom Layer w12: R1.2 6445,3864.53 6449.53,3860 v1(6480,3860)
PA1: U1.11
PA2: U1.12
PA3: U1.13
SIGNAL_IN: *1.4 R3.2 | length 229
  Top Layer w12: R3.2 5910.83,3955 *1.4
SWCLK: ST-LINK1.4 U1.37 | length 386.9
  Top Layer w12: U1.37 7038.82,4230 ST-LINK1.4
SWDIO: ST-LINK1.3 U1.34 | length 331.8
  Top Layer w12: U1.34 6928.9,3933.9 7125,4130 ST-LINK1.3
TO_ZOOM: *3.3 U2.3 | length 954.9
  Top Layer w12: v3(6250,3495) 6455,3290 v3(6470,3290)
  Bottom Layer w12: *3.3 6240,3505 v3(6250,3495) ; v3(6470,3290) 6605,3290 6655,3240 6655,3130 6559,3034 U2.3
URX: U1.31 UART1.3 | length 769
  Top Layer w12: U1.31 6886.23,3873.06 7006.94,3873.06 7030,3850 7030,3350 UART1.3
UTX: U1.30 UART1.2 | length 816.9
  Top Layer w12: U1.30@6884.45,3855.06 6949.94,3855.06 6980,3825 6980,3300 UART1.2
VCC33: C24.2 J2.1 U3.1 U3.10 | length 457.6
  Top Layer w12: C24.2@8255,4025.2 C24.2@8259.68,4029.88
  Top Layer w20: C24.2@8259.68,4029.88 8325,4029.88 ; 8375,4029.88 8325,4029.88 ; 8375.32,4140.12 8350.12,4140.12 8325,4115 8325,4029.88
  Top Layer w30: J2.1 C24.2@8264.8,4030
VCC33_MCU: 1.4 C1.2 C2.2 C3.2 C4.2 C5.2 C6.2 C8.1 C11.2 R1.1 ST-LINK1.1 U1.9 U1.24 U1.36 U1.48 U5.2 U5.4 | length 3027.6
  Top Layer w12: U1.9 6566.87,3814.47 6643.69,3814.47 6720,3890.78 v2(6720,3894.53) ; U1.48@6615,4005 6615,3955 6635,3935 6690,3935 6720,3905 v2(6720,3894.53) ; U1.24 6833.27,3816.73 6755.47,3894.53 v2(6720,3894.53) ; U1.36 6798.74,3973.27 v2(6720,3894.53)
  Top Layer w30: C8.1 6566.85,4304.25 C11.2
  Bottom Layer w12: 6615,4090 6655,4130 6725,4130 6775,4180 6930,4180 7080,4030 7080,3985 ST-LINK1.1
  Bottom Layer w20: C6.2 C5.2 C4.2 C3.2
  Bottom Layer w30: U5.2 6380,4269.45 6380.67,4268.78 6411.22,4268.78 ; R1.1 6490,4090 6590,4090 ; U5.4 6411.22,4268.78 ; C3.2 v2(6720,3894.53) 6720,3985 6615,4090 6590,4090 ; 1.4 7110,3905 ST-LINK1.1 ; 6411.22,4268.78 6590,4090
  other v4: 6566.85,4270
pads on no net: *3.6 *3.11 *3.12 *3.13 *3.14 *3.15 MC. mircoUsb1. mircoUsb1.2 mircoUsb1.3 mircoUsb1.4 mircoUsb1.MH1 mircoUsb1.MH2 U1.1 U1.4 U1.5 U1.6 U1.10 U1.22 U1.25 U1.26 U1.29 U1.32 U1.33 U1.38 U1.41 U1.42 U1.43 U1.45 U1.46 U2.5 U2.6 U2.7

## Polygon pours and split planes (outlines as drawn)
GND_ETA9635 on Top Layer "Top Layer-No Net" (solid, remove dead copper, pour order 19): 7380,665 7385,670 8595,670 8810,885 8820,895 8820,1650 8670,1800 8665,1805 7370,1805 7370,675 7380,675
GND_63000 on Top Layer "Top Layer-No Net" (solid, remove dead copper, pour order 22): 8764.61,2864.53 8759.61,2859.53 7579.61,2859.53 7574.61,2859.53 7494.61,2779.53 7494.61,1989.53 7504.61,1989.53 7589.61,1904.53 7599.61,1894.53 8724.61,1894.53 8739.61,1894.53 8819.61,1974.53 8814.61,1979.53 8814.61,2809.53 8814.61,2814.53 8764.61,2864.53
GND_60403 on Top Layer "Top Layer-No Net" (solid, remove dead copper, pour order 23): 7945,3515 8725,3515 8730,3515 8835,3410 8830,3405 8830,3020 8830,3015 8730,2915 8725,2920 7915,2920 7910,2920 7850,2980 7850,3425 7855,3425 7945,3515
GND_63001 on Top Layer "Top Layer-No Net" (solid, remove dead copper, pour order 24): 7855.35,4448.23 7860.35,4443.23 8845.35,4443.23 8845.35,3593.23 8835.35,3583.23 8830.35,3578.23 8055.35,3578.23 7855.35,3778.23 7855.35,4448.23
GND on Top Layer "Keep-Out Layer-No Net" (solid, pour order 20): 6589.97,3999.97 6589.97,3729.97 6859.97,3729.97 6859.97,3999.97
GND_TP5400 on Top Layer "Keep-Out Layer-No Net" (solid, pour order 33): 5020,1925 5020,625 6605,625 6630,650 6625,655 6625,1920
GND_ETA9635 on Bottom Layer "Top Layer-No Net" (solid, remove dead copper, pour order 25): 7380,670 8600,670 8810,880 8810,1650 8815,1655 8675,1795 8675,1800 7365,1800 7365,675 7375,675 7380,670
GND_63000 on Bottom Layer "Top Layer-No Net" (solid, remove dead copper, pour order 26): 8750,2840 7570,2840 7490,2760 7490,1975 7495,1975 7585,1885 7590,1880 8725,1880 8735,1880 8810,1955 8810,2790 8760,2840
GND_60403 on Bottom Layer "Top Layer-No Net" (solid, remove dead copper, pour order 27): 7945,3515 8725,3515 8725,3510 8825,3410 8835,3400 8835,3020 8735,2920 8730,2915 7915,2915 7850,2980 7850,3425 7855,3425 7945,3515
GND_63001 on Bottom Layer "Top Layer-No Net" (solid, remove dead copper, pour order 28): 7849.53,4449.53 8829.53,4449.53 8834.53,4444.53 8829.53,4439.53 8829.53,3584.53 8049.53,3584.53 7859.53,3774.53 7849.53,3774.53 7849.53,4449.53
GND on Bottom Layer "Keep-Out Layer-No Net" (solid, pour order 21): 6590,4000 6590,3730 6860,3730 6860,4000
GND_TP5400 on Bottom Layer "Keep-Out Layer-No Net" (solid, pour order 35): 5020,1925 5020,610 5035,625 6620,625 6620,1920 6625,1925

## Keep-outs
Keep-Out Layer:
  lines w10: 4945,570 8855,570 8855,4480 ; 4950,570 4950,4480 8860,4480

## Other copper
Top Layer:
  rectangle net GND_ETA9635: 8160,1245 8230,1350

## Silkscreen, mask and mechanical layers (free items; w line width, h text height)
Top Overlay:
  lines w10: 7850,3410 7850,3425 7935,3510 ; 7850,3420 7850,2980 7910,2920 8730,2920 8830,3020 8830,3410 8725,3515 7945,3515 ; 8047.5,3587.5 7850,3785 7850,4450 8840,4450 8840,3585 8050,3585
  lines w20: 5005,600 5005,1935 6640,1935 ; 5015,600 6640,600 ; 6640,610 6640,1932.93 ; 7515,1805 8665,1805 8815,1655 8815,890 8603.54,678.54 ccw(c8612.07,670) 8600,670 7380,670 cw(c7416.21,706.21) 7365,706.21 7365,1800 cw(c7377.07,1787.93) 7377.07,1805 7530,1805 ; 8771.46,1698.54 ccw(c8780,1707.07) 8780,1695 ; 7490,1985 7585,1890 8730,1890 8810,1970 8810,2805 8760,2855 7620,2855 7570,2855 7490,2775 7490,1985
  text "63001_3.7V_TO_3.3V" at 8065,4355 h40
  text "3.7_IN" at 8625,4290 h30
  text "CLK" at 6985.01,4205 h30
  text "GND" at 8030,4200 h30
  text "IO" at 7020,4100 h30
  text "GND" at 8650,4030 h30
  text "GND" at 6985.01,4020 h30
  text "3.3V" at 8025,3930 h30
  text "VCC" at 6985.01,3920 h30
  text "60403_5V_TO_-5V" at 8100,3395 h40
  text "GND" at 8640,3295 h20
  text "GND" at 8010,3275 h20
  text "RX" at 6990,3260 h30
  text "TX" at 6990,3160 h30
  text "60000_3.7V_TO_-5V" at 7805,2755 h40
  text "3.7V" at 7680,2600 h20
  text "GND" at 7680,2505 h20
  text "GND" at 8065,1935 h20
  text "5V" at 8185,1935 h20
  text "GND" at 5160,1645 h20
  text "5V_IN" at 8650,1625 h30
  text "5V_OUT" at 5065,1440 h30
  text "GND" at 8645,1295 h30
  text "GND" at 6515,1205 h20
  text "GND" at 7555,975 h20
  text "5V_IN" at 5730,825 h30
  text "GND" at 5975,725 h20
  text "5V_OUT" at 8280,700 h30
  text "GND" at 8480,695 h30

## Text inside footprints (layer, text, board x,y; h text height)
BT1: Top Overlay "+" at 6427.28,1414.49 h30 r270
BT2: Top Overlay "+" at 7512.72,785.51 h45.28 r90